# Altium PCB PCB1_v3.PcbDoc
Units mm, origin at the board's own origin, x right, y up, seen from the top; angles counter-clockwise.
Board outline 135.5 x 97.1 mm, 4 copper layers (Top, Signal Layer 1, Signal Layer 2, Bottom), stack 2.04 mm thick; 52 components, 108 nets, 342 pads, 77 vias.
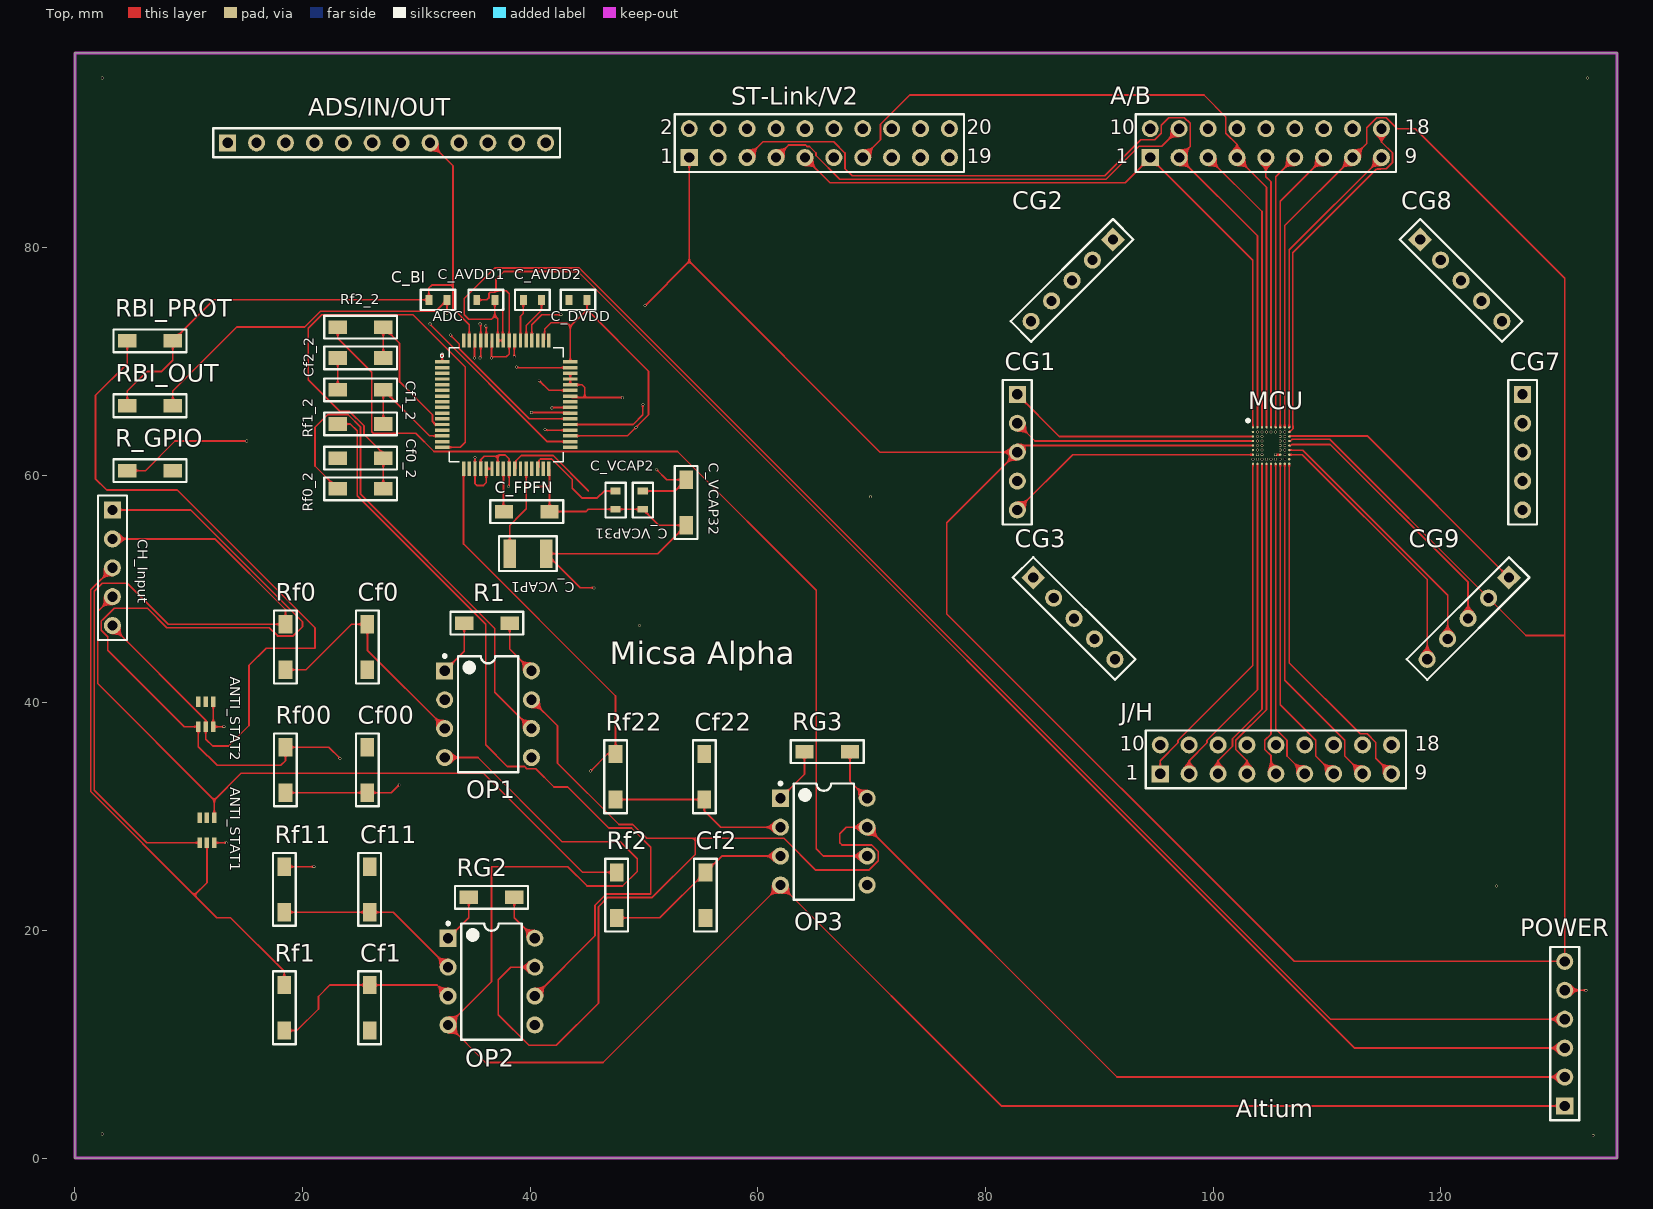
[diagram p0: Top view]
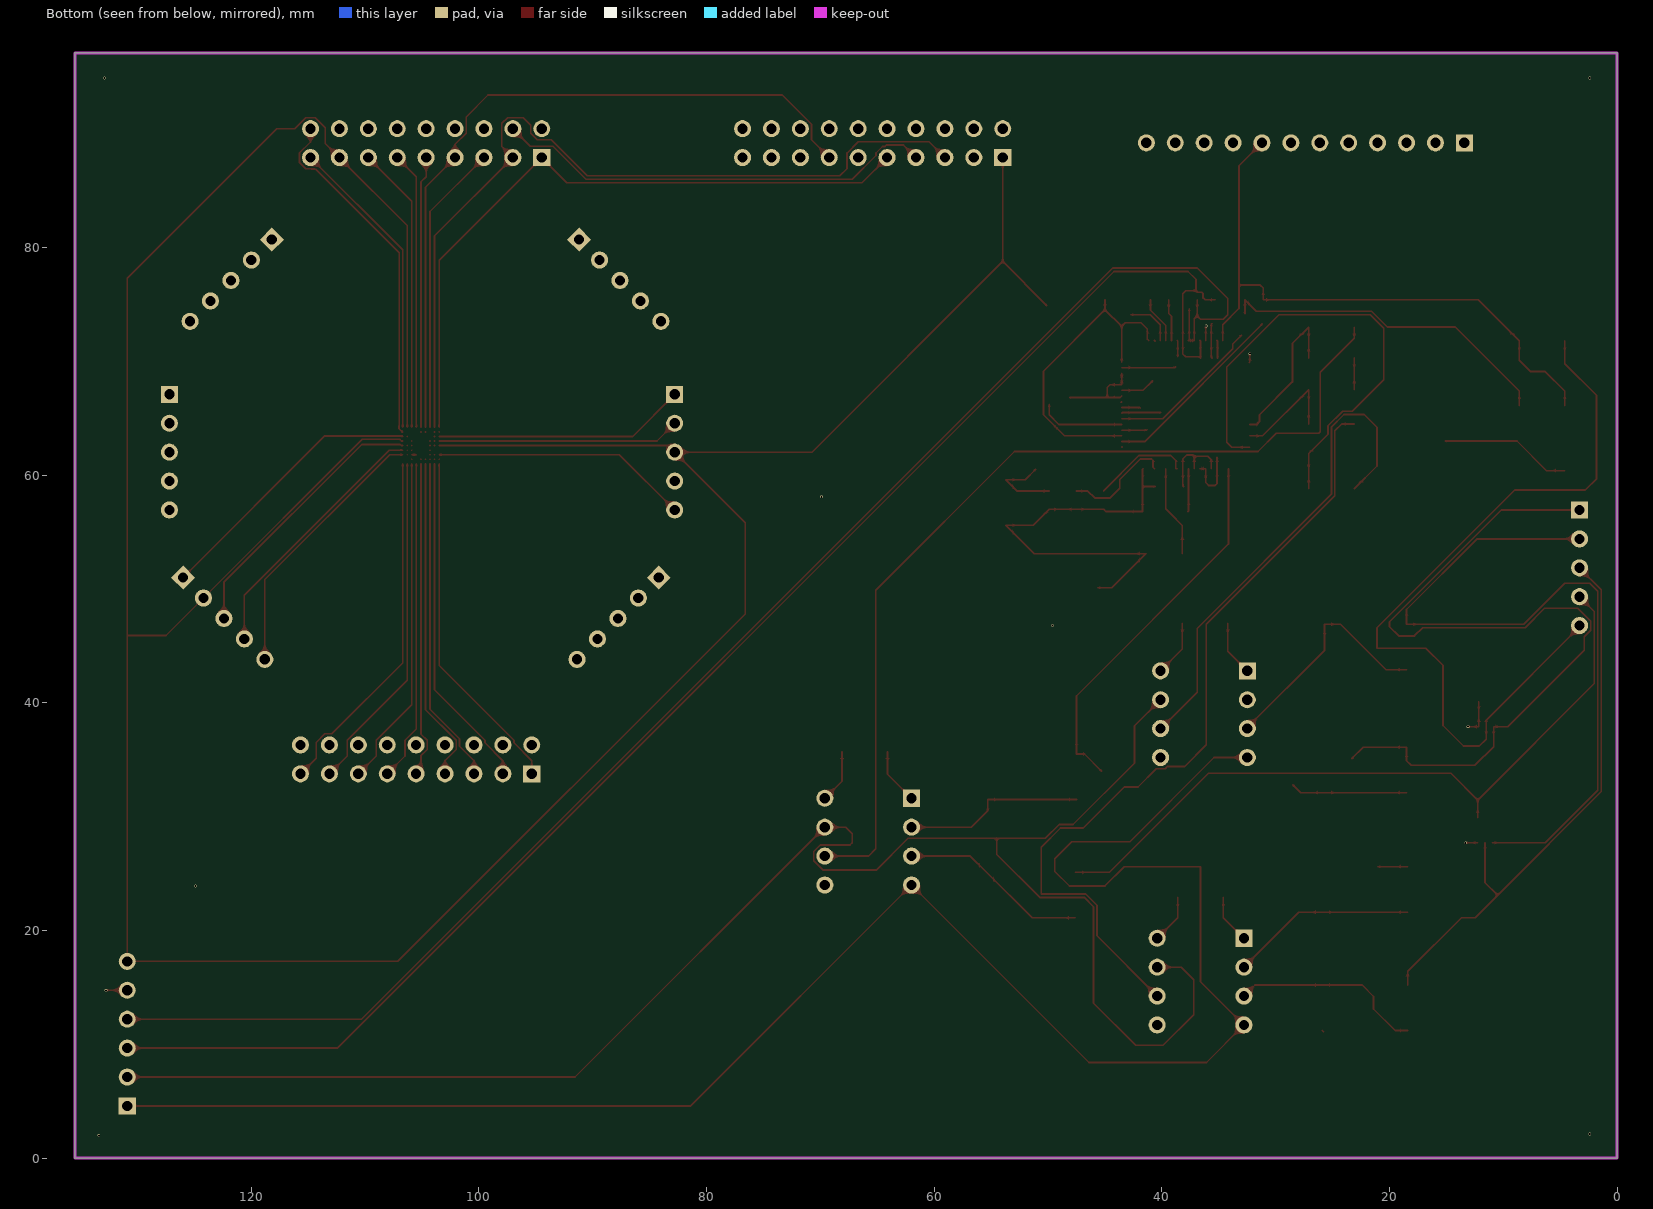
[diagram p1: Bottom view, seen from below]
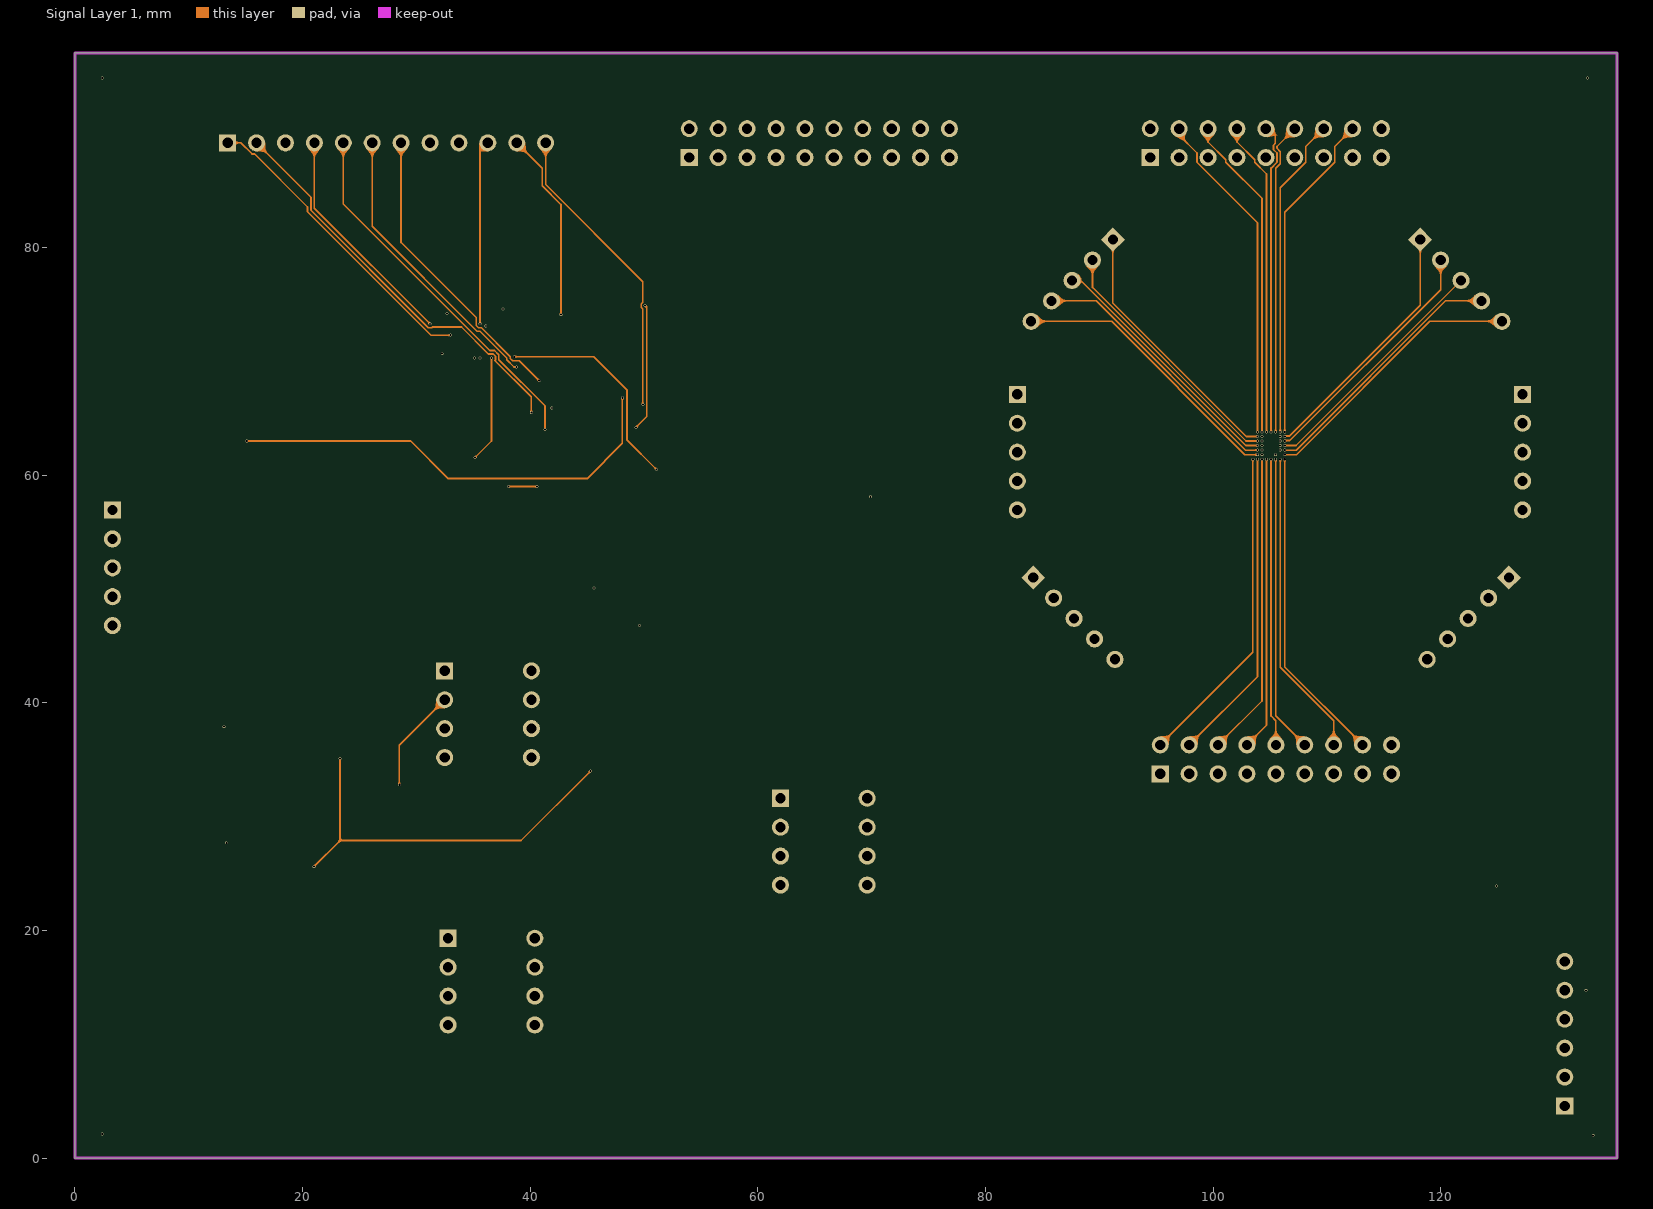
[diagram p2: Signal Layer 1]
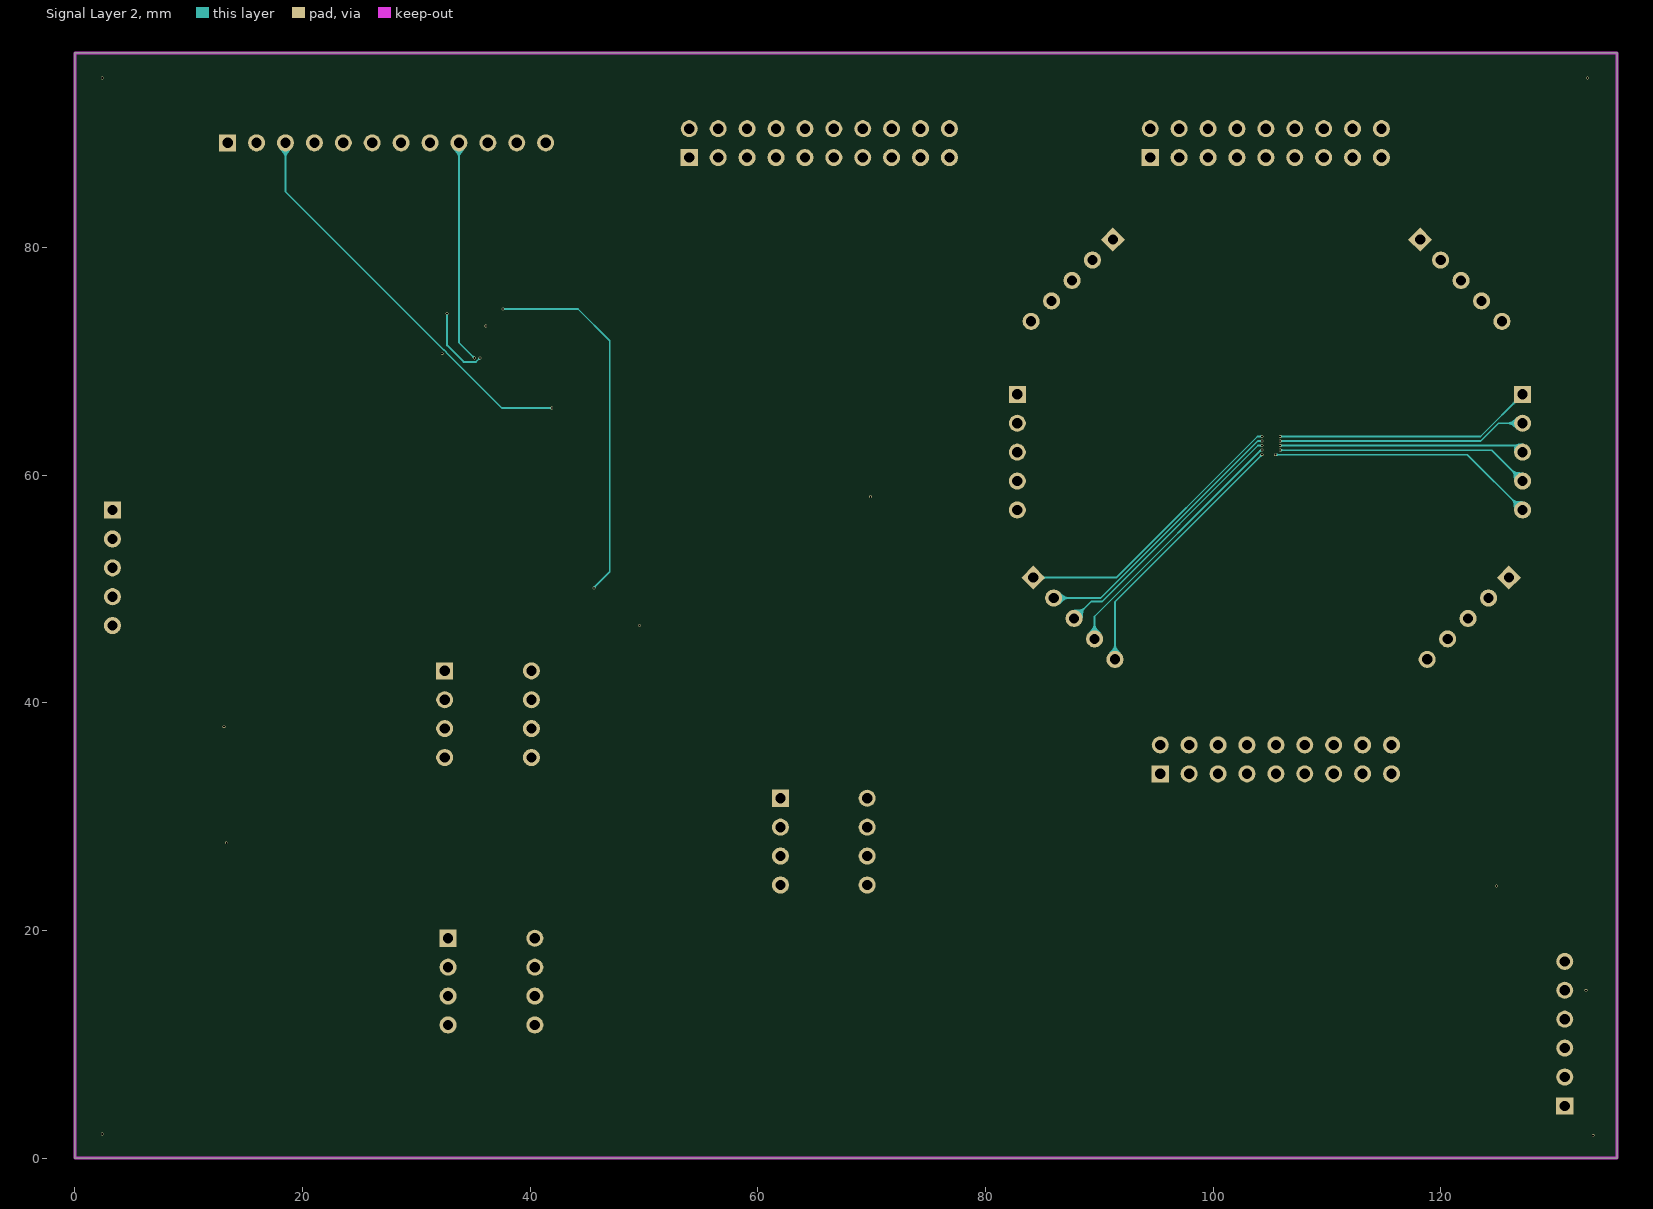
[diagram p3: Signal Layer 2]

## Layer stack, top to bottom
Top Solder: solder mask 0.02, Solder Resist, Dk 3.5
Top: signal copper 0.2
Dielectric 1: core 0.5, FR-4, Dk 4.2
Signal Layer 1: signal copper 0.2
Dielectric 2: prepreg 0.24, FR4, Dk 4.2
Signal Layer 2: signal copper 0.2
Dielectric 3: core 0.5, FR-4, Dk 4.2
Bottom: signal copper 0.2
Bottom Solder: solder mask 0.02, Solder Resist, Dk 3.5

## Board outline
0,0 0,97.1 135.5,97.1 135.5,0

## Design rules (kind name [scope] priority, off if disabled: settings)
Clearance [All] p1: gap=0.15 ignorepadtopadclearanceinfootprint=TRUE
PolygonConnect [All] p1: connectstyle=Relief reliefconductorwidth=0.254 reliefentries=4 polygonreliefangle="90 Angle" airgapwidth=0.254
RoutingTopology [All] p1: topology=Daisy_Balanced
RoutingVias [All] p1: holewidth=0.18 width=0.25 viastyle="Through Hole" minholewidth=0.18 minwidth=0.25 maxholewidth=0.2 maxwidth=0.25
SMDNeckDown [All] p1: percent=90.000
SolderMaskExpansion [All] p1: expansion=0.102
Width [All] p1: maxlimit=0.254 minlimit=0.15 preferedwidth=0.15
29 further rules are at their usual default settings.

## Classes and differential pairs
component class Main: A/B ADS/IN/OUT C_AVDD1 C_AVDD2 C_BI C_DVDD C_FPFN C_VCAP1 C_VCAP2 C_VCAP31 C_VCAP32 CG1 CG2 CG7 CG8 CG9 MCU POWER R_GPIO RBI_OUT RBI_PROT ST-Link/V2
component class AMP_filtreV2: ANTI_STAT1 ANTI_STAT2 Cf00 Cf0 Cf0_2 Cf1 Cf1_2 Cf2_2 Cf11 CH_Input OP1 OP2 R1 Rf0 Rf00 Rf0_2 Rf1 Rf1_2 Rf2 Rf2_2 Rf11 Rf22 RG2

## Components (designator, comment, footprint, x,y, rotation, side; value= is the part's Value field where it differs from the comment)
A/B "Header 9X2A" HDR2X9_CEN 94.48,87.9 r0 top
ADC "ADS1299-4PAG" QFP64P50_1200X1200X120L60X22N 37.9,66.2 r0 top
ADS/IN/OUT "Header 12" HDR1X12 13.42,89.2 r0 top
ANTI_STAT1 "TPD4E1B06DCKR" SC70-6 10.515,28.096 r0 top
ANTI_STAT2 "TPD4E1B06DCKR" SC70-6 10.415,38.296 r0 top
C_AVDD1 "LMK107B7105KA-T" "0603 (1608 Metric)" 36.1,75.4 r0 top value=1uF
C_AVDD2 "LMK107B7105KA-T" "0603 (1608 Metric)" 40.2,75.4 r0 top value=1uF
C_BI "LMK107B7105KA-T" "0603 (1608 Metric)" 31.9,75.4 r180 top value=1uF
C_DVDD "LMK107B7105KA-T" "0603 (1608 Metric)" 44.2,75.4 r180 top value=1uF
C_FPFN "C1206C106J8RACTU" "1206 (3216 Metric)" 39.7,56.8 r0 top value=10uF
C_VCAP1 "JMK325BJ107MM-T" "1210 (3225 Metric)" 39.8,53.1 r180 top value=100uF
C_VCAP2 "LMK107B7105KA-T" "0603 (1608 Metric)" 47.5,57.8 r90 top value=1uF
C_VCAP31 "LMK107B7105KA-T" "0603 (1608 Metric)" 49.9,57.8 r90 top value=1uF
C_VCAP32 "C1206C104F3GACTU" "1206 (3216 Metric)" 53.7,57.6 r90 top value=0.1uF
Cf00 "C1206C106J8RACTU" "1206 (3216 Metric)" 25.7,34.1 r90 top value=10uF
Cf0 "C1206C106J8RACTU" "1206 (3216 Metric)" 25.7,44.9 r90 top value=10uF
Cf0_2 "C1206C106J8RACTU" "1206 (3216 Metric)" 25.1,61.5 r0 top value=10uF
Cf1 "C1206C106J8RACTU" "1206 (3216 Metric)" 25.9,13.2 r90 top value=10uF
Cf1_2 "C1206C106J8RACTU" "1206 (3216 Metric)" 25.1,67.5 r0 top value=10uF
Cf2 "C1206C106J8RACTU" "1206 (3216 Metric)" 55.4,23.1 r90 top value=10uF
Cf2_2 "C1206C106J8RACTU" "1206 (3216 Metric)" 25.1,70.3 r0 top value=10uF
Cf11 "C1206C106J8RACTU" "1206 (3216 Metric)" 25.9,23.6 r90 top value=10uF
Cf22 "C1206C106J8RACTU" "1206 (3216 Metric)" 55.3,33.5 r90 top value=10uF
CG1 "Header 5" HDR1X5 82.8,67.1 r270 top
CG2 "Header 5" HDR1X5 91.2,80.7 r225 top
CG3 "Header 5" HDR1X5 84.2,51 r315 top
CG7 "Header 5" HDR1X5 127.2,67.1 r270 top
CG8 "Header 5" HDR1X5 118.2,80.7 r315 top
CG9 "Header 5" HDR1X5 126,51 r225 top
CH_Input "Header 5" HDR1X5 3.3,56.94 r270 top
J/H "Header 9X2A" HDR2X9_CEN 95.36,33.76 r0 top
MCU "STM32F205RGY6TR" STM-WLCSP64+2 105.1,62.6 r0 top
OP1 "INA118P" TI-P8 36.3,39 r0 top
OP2 "INA118P" TI-P8 36.6,15.5 r0 top
OP3 "INA118P" TI-P8 65.8,27.8 r0 top
POWER "Header 6" HDR1X6 130.9,4.58 r90 top
R1 "Res2" "1206 (3216 Metric) RES" 36.2,47 r180 top value=5K
R_GPIO "RT1206BRD07330KL" "1206 (3216 Metric) RES" 6.6,60.4 r180 top value=330K
RBI_OUT "RG3216P-1004-B-T1" "1206 (3216 Metric) RES" 6.6,66.1 r180 top value=1M
RBI_PROT "RT1206BRD07330KL" "1206 (3216 Metric) RES" 6.6,71.8 r180 top value=330K
Rf00 "RC1206FR-07390RL" "1206 (3216 Metric) RES" 18.5,34.1 r90 top value=390
Rf0 "RC1206FR-07390RL" "1206 (3216 Metric) RES" 18.5,44.9 r90 top value=390
Rf0_2 "RC1206FR-07390RL" "1206 (3216 Metric) RES" 25.1,58.8 r180 top value=390
Rf1 "RC1206FR-07390RL" "1206 (3216 Metric) RES" 18.4,13.2 r90 top value=390
Rf1_2 "RC1206FR-07390RL" "1206 (3216 Metric) RES" 25.1,64.5 r180 top value=390
Rf2 "RC1206FR-07390RL" "1206 (3216 Metric) RES" 47.6,23.1 r90 top value=390
Rf2_2 "RC1206FR-07390RL" "1206 (3216 Metric) RES" 25.1,73 r180 top value=390
Rf11 "RC1206FR-07390RL" "1206 (3216 Metric) RES" 18.4,23.6 r90 top value=390
Rf22 "RC1206FR-07390RL" "1206 (3216 Metric) RES" 47.5,33.5 r90 top value=390
RG2 "Res2" "1206 (3216 Metric) RES" 36.6,22.9 r180 top value=5K
RG3 "RT1206BRD075KL" "1206 (3216 Metric) RES" 66.1,35.7 r180 top value=5K
ST-Link/V2 "XG4C-2031" HDR2X10 53.98,87.9 r0 top

## Footprints (in the part's own frame and the unit in brackets; to place one, negate y for a bottom-side part, rotate by r counter-clockwise, add the part's x,y. Pads: shape width x height; smd on the part's side, far side on the other; paste and mask are expansions set on the pad)
"0603 (1608 Metric)" [mm]
  rect 0.6x0.9 smd: 1(-0.8,0) 2(0.8,0)
  silkscreen extent -1.52,-0.89 1.52,0.89
"1206 (3216 Metric)" [mm]
  rect 1.6x1.2 smd: 1(-2,0) 2(2,0)
  silkscreen extent -3.2,-1 3.2,1
"1206 (3216 Metric) RES" [mm]
  rect 1.6x1.2 smd: 1(-2,0) 2(2,0)
  silkscreen extent -3.2,-1 3.2,1
"1210 (3225 Metric)" [mm]
  rect 1.1x2.5 smd: 1(-1.6,0) 2(1.6,0)
  silkscreen extent -2.54,-1.52 2.54,1.52
HDR1X5 [mm] "Connector; Header; 5 Position"
  rect 1.5x1.5 hole 0.9: 1(0,0)
  round 1.5 hole 0.9: 2(2.54,0) 3(5.08,0) 4(7.62,0) 5(10.16,0)
  silkscreen extent -1.27,-1.27 11.43,1.27
HDR1X6 [mm] "Connector; Header; 6 Position"
  rect 1.5x1.5 hole 0.9: 1(0,0)
  round 1.5 hole 0.9: 2(2.54,0) 3(5.08,0) 4(7.62,0) 5(10.16,0) 6(12.7,0)
  silkscreen extent -1.27,-1.27 13.97,1.27
HDR1X12 [mm] "Connector; Header; 12 Position"
  rect 1.5x1.5 hole 0.9: 1(0,0)
  round 1.5 hole 0.9: 2(2.54,0) 3(5.08,0) 4(7.62,0) 5(10.16,0) 6(12.7,0) 7(15.24,0) 8(17.78,0) 9(20.32,0) 10(22.86,0) 11(25.4,0) 12(27.94,0)
  silkscreen extent -1.27,-1.27 29.21,1.27
HDR2X9_CEN [mm] "Connector; Header; 9x2 Position"
  rect 1.5x1.5 hole 0.9: 1(0,0)
  round 1.5 hole 0.9: 2(2.54,0) 3(5.08,0) 4(7.62,0) 5(10.16,0) 6(12.7,0) 7(15.24,0) 8(17.78,0) 9(20.32,0) 10(0,2.54) 11(2.54,2.54) 12(5.08,2.54) 13(7.62,2.54) 14(10.16,2.54) 15(12.7,2.54) 16(15.24,2.54) 17(17.78,2.54) 18(20.32,2.54)
  silkscreen extent -1.27,-1.27 21.59,3.81
HDR2X10 [mm] "Connector; Header; 10x2 Position"
  rect 1.5x1.5 hole 0.9: 1(0,0)
  round 1.5 hole 0.9: 2(0,2.54) 3(2.54,0) 4(2.54,2.54) 5(5.08,0) 6(5.08,2.54) 7(7.62,0) 8(7.62,2.54) 9(10.16,0) 10(10.16,2.54) 11(12.7,0) 12(12.7,2.54) 13(15.24,0) 14(15.24,2.54) 15(17.78,0) 16(17.78,2.54) 17(20.32,0) 18(20.32,2.54) 19(22.86,0) 20(22.86,2.54)
  silkscreen extent -1.27,-1.27 24.13,3.81
QFP64P50_1200X1200X120L60X22N [mm]
  rect 1.26x0.3 smd: 1(-5.63,3.75) 2(-5.63,3.25) 3(-5.63,2.75) 4(-5.63,2.25) 5(-5.63,1.75) 6(-5.63,1.25) 7(-5.63,0.75) 8(-5.63,0.25) 9(-5.63,-0.25) 10(-5.63,-0.75) 11(-5.63,-1.25) 12(-5.63,-1.75) 13(-5.63,-2.25) 14(-5.63,-2.75) 15(-5.63,-3.25) 16(-5.63,-3.75) 33(5.63,-3.75) 34(5.63,-3.25) 35(5.63,-2.75) 36(5.63,-2.25) 37(5.63,-1.75) 38(5.63,-1.25) 39(5.63,-0.75) 40(5.63,-0.25) 41(5.63,0.25) 42(5.63,0.75) 43(5.63,1.25) 44(5.63,1.75) 45(5.63,2.25) 46(5.63,2.75) 47(5.63,3.25) 48(5.63,3.75)
  rect 0.3x1.26 smd: 17(-3.75,-5.63) 18(-3.25,-5.63) 19(-2.75,-5.63) 20(-2.25,-5.63) 21(-1.75,-5.63) 22(-1.25,-5.63) 23(-0.75,-5.63) 24(-0.25,-5.63) 25(0.25,-5.63) 26(0.75,-5.63) 27(1.25,-5.63) 28(1.75,-5.63) 29(2.25,-5.63) 30(2.75,-5.63) 31(3.25,-5.63) 32(3.75,-5.63) 49(3.75,5.63) 50(3.25,5.63) 51(2.75,5.63) 52(2.25,5.63) 53(1.75,5.63) 54(1.25,5.63) 55(0.75,5.63) 56(0.25,5.63) 57(-0.25,5.63) 58(-0.75,5.63) 59(-1.25,5.63) 60(-1.75,5.63) 61(-2.25,5.63) 62(-2.75,5.63) 63(-3.25,5.63) 64(-3.75,5.63)
  silkscreen extent -5.8,-5 5,5
SC70-6 [mm]
  rect 0.4x0.9 smd: 1(0.435,-0.396) 2(1.085,-0.396) 3(1.735,-0.396) 4(1.735,1.803) 5(1.085,1.804) 6(0.435,1.803)
STM-WLCSP64+2 [mm] "BGA, 66-Balls, Body 3.97x3.64mm, Pitch 0.4mm"
  round 0.2 smd: A1(-1.6,1.6) A2(-1.2,1.6) A3(-0.8,1.6) A4(-0.4,1.6) A5(0,1.6) A6(0.4,1.6) A7(0.8,1.6) A8(1.2,1.6) A9(1.6,1.6) B1(-1.6,1.2) B2(-1.2,1.2) B3(-0.8,1.2) B4(-0.4,1.2) B5(0,1.2) B6(0.4,1.2) B7(0.8,1.2) B8(1.2,1.2) B9(1.6,1.2) C1(-1.6,0.8) C2(-1.2,0.8) C3(-0.8,0.8) C7(0.8,0.8) C8(1.2,0.8) C9(1.6,0.8) D1(-1.6,0.4) D2(-1.2,0.4) D3(-0.8,0.4) D7(0.8,0.4) D8(1.2,0.4) D9(1.6,0.4) E1(-1.6,0) E2(-1.2,0) E3(-0.8,0) E7(0.8,0) E8(1.2,0) E9(1.6,0) F1(-1.6,-0.4) F2(-1.2,-0.4) F3(-0.8,-0.4) F7(0.8,-0.4) F8(1.2,-0.4) F9(1.6,-0.4) G1(-1.6,-0.8) G2(-1.2,-0.8) G3(-0.8,-0.8) G7(0.8,-0.8) G8(1.2,-0.8) G9(1.6,-0.8) H1(-1.6,-1.2) H2(-1.2,-1.2) H3(-0.8,-1.2) H4(-0.4,-1.2) H5(0,-1.2) H6(0.4,-1.2) H7(0.8,-1.2) H8(1.2,-1.2) H9(1.6,-1.2) J1(-1.6,-1.6) J2(-1.2,-1.6) J3(-0.8,-1.6) J4(-0.4,-1.6) J5(0,-1.6) J6(0.4,-1.6) J7(0.8,-1.6) J8(1.2,-1.6) J9(1.6,-1.6)
  silkscreen extent -2.15,2.07 -1.9,2.32, body extent -1.82,-1.98 1.82,1.98, height 0.6
TI-P8 [mm] "DIP, 8-Leads, Body 10.15x6.6mm, Pitch 2.54mm"
  rect 1.5x1.5 hole 0.9: 1(-3.81,3.81)
  round 1.5 hole 0.9: 2(-3.81,1.27) 3(-3.81,-1.27) 4(-3.81,-3.81) 5(3.81,-3.81) 6(3.81,-1.27) 7(3.81,1.27) 8(3.81,3.81)
  silkscreen extent -3.93,-5.1 2.65,5.23, body extent -3.95,-5.07 3.95,5.07, height 5.08

## Part data
A/B J/H: "Header, 9-Pin, Dual row", LatestRevisionDate=17-Jul-2002, LatestRevisionNote="Re-released for DXP Platform.", Publisher="Altium Limited"
ADC: "IC AFE 4-CH 24BIT 64TQFP", Package="TQFP-64 Texas Instruments", Availability=Good, MF="Texas Instruments", MP=ADS1299-4PAG, Price="27.58 USD"
ADS/IN/OUT: "Header, 12-Pin", LatestRevisionDate=17-Jul-2002, LatestRevisionNote="Re-released for DXP Platform.", Publisher="Altium Limited"
ANTI_STAT1 ANTI_STAT2: "TVS DIODE 5.5VWM 14.5VC SC70-6", Package="SC-70 Texas Instruments", Availability=Good, MF="Texas Instruments", MP=TPD4E1B06DCKR, Price="0.29 USD"
C_AVDD1 C_AVDD2 C_BI C_DVDD C_VCAP2 C_VCAP31: library part Cap, "1µF ±10% 10V Ceramic Capacitor X7R 0603 (1608 Metric)", LatestRevisionDate=17-Jul-2002, LatestRevisionNote="Re-released for DXP Platform.", Published=8-Jun-2000, Publisher="Altium Limited"
  C_AVDD1 C_AVDD2 C_DVDD C_VCAP2 C_VCAP31: PackageDescription="Surface Mount, MLCC", PackageReference="0603 (1608 Metric)"
  C_BI: PackageDescription="0603 (1608 Metric)"
C_FPFN Cf00 Cf0 Cf0_2 Cf1 Cf1_2 Cf2 Cf2_2 Cf11 Cf22: library part Cap, "10µF ±5% 10V Ceramic Capacitor X7R 1206 (3216 Metric)", LatestRevisionDate=17-Jul-2002, LatestRevisionNote="Re-released for DXP Platform.", PackageDescription="CAP CER 10UF 10V X7R 1206", PackageReference="1206 (3216 Metric)", Published=8-Jun-2000, Publisher="Altium Limited"
C_VCAP1: library part Cap, "100µF ±20% 6.3V Ceramic Capacitor X5R 1210 (3225 Metric)", LatestRevisionDate=17-Jul-2002, LatestRevisionNote="Re-released for DXP Platform.", PackageDescription="1210 (3225 Metric)", PackageReference=MK325, Published=8-Jun-2000, Publisher="Altium Limited"
C_VCAP32: library part Cap, "0.1µF ±1% 25V Ceramic Capacitor C0G, NP0 1206 (3216 Metric)", LatestRevisionDate=17-Jul-2002, LatestRevisionNote="Re-released for DXP Platform.", PackageDescription="CAP CER 0.1UF 25V C0G/NP0 1206", PackageReference="1206 (3216 Metric)", Published=8-Jun-2000, Publisher="Altium Limited"
CG1 CG2 CG3 CG7 CG8 CG9 CH_Input: "Header, 5-Pin", LatestRevisionDate=17-Jul-2002, LatestRevisionNote="Re-released for DXP Platform.", Publisher="Altium Limited"
MCU: "ARM Cortex-M3 32-bit MCU, 1024 KB Flash, 128 KB Internal RAM, 51 I/Os, 66-pin WLCSP, -40 to 85 degC, Tape and Reel", I/Os (High Current)=51, Operating Frequency(F) (Processor speed) (MHz)=120, Supplier Part Number 1=497-13338-2-ND, Supply Voltage(Vcc) min (V)=1.8, ComponentLink1Description="Manufacturer URL", ComponentLink1URL=http://www.st.com/web/en/home.html, ComponentLink2Description=Datasheet, ComponentLink2URL=http://www.st.com/st-web-ui/static/active/en/resource/technical/document/datasheet/CD00237391.pdf, ComponentLink3Description="Package Specification", ComponentLink3URL=http://www.st.com/st-web-ui/static/active/en/resource/technical/document/datasheet/CD00237391.pdf, Core="ARM Cortex-M3", D/A Converter="2x12-bit (2 Channel)", DatasheetVersion="Rev. 9", FLASH Size (Prog) (kB)=1024, Internal RAM Size (kB)=128, Mounting Technology="Surface Mount", PackageDescription="64+2-Ball Wafer Level Chip Size package, 3.639 x 3.971 mm Body, 0.4 mm Pitch", PackageReference=WLCSP64+2, PackageVersion="Rev. 10, 10/2012", Packing="Tape and Reel", PartNumber=STM32F205RGY6TR, Supplier 1=Digi-Key, Supplier 2=Digi-Key, Supplier 3=Digi-Key, Supplier 4=Newark, Supplier 5=Newark, Supplier Part Number 2=497-13338-1-ND, Supplier Part Number 3=497-13338-6-ND, Supplier Part Number 4=99W9826, Supplier Part Number 5=73T2317
OP1 OP2 OP3: "Precision, Low Power Instrumentation Amplifier, -40 to 85 degC, 8-pin DIP (P8), Green (RoHS & no Sb/Br)", Input Bias Current (+/-)(Max)(nA)=10, Manufacturer="Texas Instruments", Quiescent Current (+/-)(Typ)(mA)=0.35, Supplier Part Number 1=INA118P-ND, CMRR(Min)(dB)=98, Code_JEDEC=MS-001, ComponentLink1Description="Manufacturer URL", ComponentLink1URL=http://www.ti.com/, ComponentLink2Description=Datasheet, ComponentLink2URL=http://www.ti.com/general/docs/lit/getliterature.tsp?genericPartNumber=INA118&fileType=pdf, ComponentLink3Description="Package Specification", ComponentLink3URL=http://www.ti.com/litv/pdf/mpdi001b, DatasheetVersion=SBOS027, Eco-Plan="Green (RoHS & no Sb/Br)", Gain(V/V)="1 to 10000", Input Offset (+/-)(Max)(uV)=125, Input Offset Drift (+/-)(Max)(uV/Degrees Celsius)=1, Mounting Technology="Through Hole", Noise at 1kHz(Typ)(nV/rt(Hz))=10, Non-Linearity (+/-)(Max)(%)=0.004, Number of Channels=1, Output Offset (+/-)(Max)(uV)=1000/G, Output Offset Drift (+/-)(Max)(uV/Degrees Celsius)=20/G, PackageDescription="8-Pin Plastic In-Line, Body 9.59 x 6.35 mm, Pitch 2.54 mm", PackageReference=P8, PackageVersion="4040082/E, 04/2010", PartNumber=INA118P, SubFamily="Single Supply", Supplier 1=Digi-Key, Supplier 2=Newark, Supplier 3=Mouser, Supplier Part Number 2=96K4515, Supplier Part Number 3=595-INA118P, Vs(Max)(V)=36, Vs(Min)(V)=2.7
POWER: "Header, 6-Pin", LatestRevisionDate=17-Jul-2002, LatestRevisionNote="Re-released for DXP Platform.", Publisher="Altium Limited"
R1 RG2: "5 kOhms ±0.1% 0.25W, 1/4W Chip Resistor 1206 (3216 Metric) Moisture Resistant Thin Film", LatestRevisionDate=17-Jul-2002, LatestRevisionNote="Re-released for DXP Platform.", PackageDescription="RES SMD 5K OHM 0.1% 1/4W 1206", PackageReference="1206 (3216 Metric)", Published=8-Jun-2000, Publisher="Altium Limited"
R_GPIO RBI_PROT: library part Res2, "330 kOhms ±0.1% 0.25W, 1/4W Chip Resistor 1206 (3216 Metric) Moisture Resistant Thin Film", LatestRevisionDate=17-Jul-2002, LatestRevisionNote="Re-released for DXP Platform.", PackageDescription="RES SMD 330K OHM 0.1% 1/4W 1206", PackageReference="1206 (3216 Metric)", Published=8-Jun-2000, Publisher="Altium Limited"
RBI_OUT: library part Res2, "1 MOhms ±0.1% 0.25W, 1/4W Chip Resistor 1206 (3216 Metric) Anti-Sulfur, Automotive AEC-Q200 Thin Film", LatestRevisionDate=17-Jul-2002, LatestRevisionNote="Re-released for DXP Platform.", PackageDescription="RES SMD 1M OHM 0.1% 1/4W 1206", PackageReference="1206 (3216 Metric)", Published=8-Jun-2000, Publisher="Altium Limited"
Rf00 Rf0 Rf11 Rf22: library part Res2, "390 Ohms ±1% 0.25W, 1/4W Chip Resistor 1206 (3216 Metric) Moisture Resistant Thick Film", LatestRevisionDate=17-Jul-2002, LatestRevisionNote="Re-released for DXP Platform.", PackageDescription="RES SMD 390 OHM 1% 1/4W 1206", PackageReference="1206 (3216 Metric)", Published=8-Jun-2000, Publisher="Altium Limited"
Rf0_2 Rf1 Rf1_2 Rf2 Rf2_2: library part Res2, "Resistor", LatestRevisionDate=17-Jul-2002, LatestRevisionNote="Re-released for DXP Platform.", PackageDescription="RES SMD 390 OHM 1% 1/4W 1206", PackageReference="1206 (3216 Metric)", Published=8-Jun-2000, Publisher="Altium Limited"
RG3: library part Res2, "5 kOhms ±0.1% 0.25W, 1/4W Chip Resistor 1206 (3216 Metric) Moisture Resistant Thin Film", LatestRevisionDate=17-Jul-2002, LatestRevisionNote="Re-released for DXP Platform.", PackageDescription="RES SMD 5K OHM 0.1% 1/4W 1206", PackageReference="1206 (3216 Metric)", Published=8-Jun-2000, Publisher="Altium Limited"
ST-Link/V2: library part "Header 10X2", "Header, 10-Pin, Dual row", LatestRevisionDate=17-Jul-2002, LatestRevisionNote="Re-released for DXP Platform.", Publisher="Altium Limited"

## Free pads (board coordinates)
  round 0 on Mech16 paste+0 mask+0: 1(57.8,52)

## Via types
v1: diameter 0.25, hole 0.18, Top to Signal Layer 1, 49 vias
v2: diameter 0.25, hole 0.18, Top to Signal Layer 2, 16 vias
v3: diameter 0.25, hole 0.18, Top to Bottom, 12 vias

## Nets (pads, with @x,y where several pads share a name; then routed paths per layer and width w, separated by ;. In a path a pad name is that pad's centre, name@x,y a point inside that pad or via, vN(x,y) a via of type N, cw(c..) or ccw(c..) an arc to the next point about the centre after c; other vN are vias at no path point)
AVDD: ADC.19 ADC.21 ADC.22 ADC.56 ADC.59 C_AVDD1.1 POWER.3 | length 150
  Top w0.15: v1(35.15,61.55) ADC.19 35.15,59.25 35.3,59.1 35.9,59.1 36.15,59.35 ADC.21 ADC.22 ; C_AVDD1.1 36.2,75.4 36.375,75.575 36.375,75.943 36.507,76.075 36.875,76.075 37,76.2 ; ADC.59 36.6,71.78 v1(36.6,70.3) 36.7,70.4 37.9,70.4 38.15,70.65 ADC.56 38.15,75.95 37.9,76.2 37,76.2 ; POWER.3 112.44,9.66 44.2,77.9 37.7,77.9 37,77.2 37,76.2
  Signal Layer 1 w0.15: v1(35.15,61.55) 36.6,63 v1(36.6,70.3)
AVSS: ADC.20 ADC.23 ADC.25 ADC.32 ADC.57 ADC.58 C_AVDD1.2 C_FPFN.2 C_VCAP1.1 C_VCAP2.1 C_VCAP31.1 C_VCAP32.1 POWER.4 | length 215.3
  Top w0.15: ADC.20 35.65,61.35 35.95,61.65 37.15,61.65 ; C_AVDD1.2 36.9,74 ; ADC.23 37.15,61.65 ; v2(37.6,74.6) 37.6,71.88 ADC.57 ADC.58 37.15,73.75 36.9,74 ; v1(38.1,59) 38.15,59.05 ADC.25 38.15,61.425 37.8,61.775 37.275,61.775 37.15,61.65 ; v1(40.6,59) 41.7,59 ; ADC.32 41.7,60.52 41.7,59 ; v2(45.6,50.1) 44.4,50.1 C_VCAP1.1 51.2,53.1 C_VCAP32.1 51.3,55.6 C_VCAP31.1 C_VCAP2.1 45.1,57 44.9,56.8 C_FPFN.2 41.7,59 ; POWER.4 110.324,12.2 44.324,78.2 36.876,78.2 34.2,75.524 34.2,74.1 34.6,73.7 36.6,73.7 36.9,74
  Signal Layer 1 w0.15: v1(38.1,59) v1(40.6,59)
  Signal Layer 2 w0.15: v2(37.6,74.6) 44.2,74.6 47,71.8 47,51.5 v2(45.6,50.1)
DVDD: A/B.8 ADC.35 ADC.48 ADC.50 C_DVDD.1 CG1.3 CG9.2 MCU.A8 MCU.D9 MCU.E1 POWER.6 ST-Link/V2.1 | length 339.4
  Top w0.15: ADC.50 41.275,71.955 41.275,72.841 41.834,73.4 43.2,73.4 43.53,73.07 ; ADC.35 48.55,63.45 v1(49.3,64.2) 50.4,65.3 50.4,69.14 45,74.54 ; ADC.48 43.53,73.07 ; C_DVDD.1 45,74.54 ; v1(50.1,74.9) 53.98,78.78 ; ST-Link/V2.1 53.98,78.78 ; MCU.E1 83.38,62.6 CG1.3 ; MCU.A8 106.3,81.94 A/B.8 113.5,89.14 113.5,90.519 114.396,91.415 115.204,91.415 116.179,90.44 117.76,90.44 130.9,77.3 130.9,45.908 ; MCU.D9 106.805,63 106.955,63.15 110.258,63.15 CG9.2 127.5,45.908 130.9,45.908 ; 43.53,73.07 45,74.54 ; 53.98,78.78 70.74,62.02 CG1.3 ; CG1.3 76.6,55.82 76.6,47.8 107.12,17.28 POWER.6 130.9,40 130.9,45.908
  Signal Layer 1 w0.15: v1(49.3,64.2) 50.25,65.15 50.25,74.75 v1(50.1,74.9)
GNDA: A/B.10 ADC.1 ADC.2 ADC.3 ADC.4 ADC.5 ADC.6 ADC.7 ADC.8 ADC.9 ADC.10 ADC.31 ADC.33 ADC.41 ADC.49 ADC.51 ADC.60 ANTI_STAT1.3 ANTI_STAT1.5 ANTI_STAT2.3 ANTI_STAT2.4 ANTI_STAT2.5 C_DVDD.2 Cf0.1 Cf00.2 Cf0_2.1 Cf1.1 Cf1_2.1 Cf2.1 Cf2_2.1 Cf11.2 Cf22.2 CG1.4 CG8.2 J/H.18 MCU.B1 MCU.D8 MCU.F1 MCU.H9 OP1.5 OP2.5 OP3.5 POWER.5 R_GPIO.1 ST-Link/V2.4 ST-Link/V2.6 ST-Link/V2.8 ST-Link/V2.10 ST-Link/V2.12 ST-Link/V2.14 ST-Link/V2.16 ST-Link/V2.18 ST-Link/V2.20 | length 33.1
  Top w0.15: ANTI_STAT2.4 ANTI_STAT2.3 v3(13.1,37.9) ; ANTI_STAT1.3 v3(13.3,27.7) ; Cf1_2.1 Cf2_2.1 ; Cf1.1@25.8,11.1 Cf1.1 ; v3(32.27,70.67) ADC.1 ADC.1@32.32,69.9 ; v3(36.1,73.1) 36.15,73.05 ADC.60 ; ADC.51@40.6,71.78 ADC.51 ; ADC.33@43.48,62.5 ADC.33 ; ADC.41 ADC.41@43.58,66.4 ; POWER.5 v3(132.76,14.74)
  Signal Layer 1 w0.15: v1(106.3,63) 106.35,63.05 106.75,63.05 119.996,76.296 CG8.2
  other v3: 133.4,2 2.4,2.1 124.9,23.9 49.6,46.8 69.9,58.1 2.4,94.9 132.9,94.9
NetA/B_1: A/B.1 MCU.A1 ST-Link/V2.9 | length 59.6
  Top w0.15: ST-Link/V2.9 66.34,85.7 92.28,85.7 A/B.1 103.5,78.88 MCU.A1
NetA/B_2: A/B.2 MCU.A2 ST-Link/V2.5 | length 74.3
  Top w0.15: ST-Link/V2.5 60.46,89.3 66.659,89.3 67.655,88.304 67.655,86.945 68.3,86.3 90.476,86.3 93.641,89.465 94.884,89.465 95.455,90.036 95.455,90.755 96.115,91.415 97.485,91.415 97.995,90.905 97.995,88.875 A/B.2 103.9,81.02 MCU.A2
NetA/B_3: A/B.3 MCU.A3 | length 25.7
  Top w0.15: A/B.3 104.3,83.16 MCU.A3
NetA/B_4: A/B.4 MCU.A4 ST-Link/V2.13 | length 64.5
  Top w0.15: ST-Link/V2.13 70.785,89.465 70.785,90.844 73.341,93.4 99.2,93.4 101.125,91.475 101.125,90.036 102.1,89.061 A/B.4 104.7,85.3 MCU.A4
NetA/B_5: A/B.5 MCU.A5 | length 23.9
  Top w0.15: A/B.5 104.64,86.22 105.1,85.76 MCU.A5
NetA/B_6: A/B.6 MCU.A6 | length 24.4
  Top w0.15: MCU.A6 105.5,86.22 A/B.6
NetA/B_7: A/B.7 MCU.A7 | length 25.3
  Top w0.15: MCU.A7 105.9,84.08 A/B.7
NetA/B_9: A/B.9 MCU.A9 | length 27.1
  Top w0.15: MCU.A9 106.7,79.8 A/B.9
NetA/B_11: A/B.11 MCU.B2 ST-Link/V2.7 | length 68.6
  Top w0.15: ST-Link/V2.7 62.7,89 64.201,89 64.326,88.875 64.544,88.875 65.115,88.304 65.115,88.086 67.201,86 90.6,86 93.5,88.9 95.48,88.9 A/B.11
  Signal Layer 1 w0.15: A/B.11 97.02,89.869 98.585,88.304 98.585,87.496 103.9,82.181 v1(103.9,63.8)
NetA/B_12: A/B.12 MCU.B3 | length 28.6
  Signal Layer 1 w0.15: A/B.12 99.56,89.279 101.125,87.714 101.125,87.496 104.3,84.321 v1(104.3,63.8)
NetA/B_13: A/B.13 MCU.B4 | length 27.7
  Signal Layer 1 w0.15: A/B.13 102.1,89.279 103.665,87.714 103.665,87.496 104.7,86.461 v1(104.7,63.8)
NetA/B_14: A/B.14 MCU.B5 | length 27.6
  Signal Layer 1 w0.15: A/B.14 105.1,89.98 105.465,89.98 105.465,89.149 105.315,88.999 105.315,88.604 105.615,88.304 105.615,87.496 105.1,86.981 v1(105.1,63.8)
NetA/B_15: A/B.15 MCU.B6 | length 27.6
  Signal Layer 1 w0.15: v1(105.5,63.8) 105.5,86.957 105.915,87.372 105.915,88.428 105.615,88.728 105.615,88.875 A/B.15
NetA/B_16: A/B.16 MCU.B7 | length 28.2
  Signal Layer 1 w0.15: v1(105.9,63.8) 105.9,85.241 108.155,87.496 108.155,88.875 A/B.16
NetA/B_17: A/B.17 MCU.B8 | length 29.1
  Signal Layer 1 w0.15: v1(106.3,63.8) 106.3,83.101 110.695,87.496 110.695,88.875 A/B.17
NetA/B_18: A/B.18 MCU.B9 | length 31.4
  Top w0.15: MCU.B9 106.76,63.8 106.76,63.875 106.835,63.875 107.025,64.065 107.025,64.335 107.001,64.359 107.001,64.508 107,64.509 107,79.529 114.346,86.874 114.358,86.874 114.374,86.891 114.444,86.891 114.458,86.904 114.744,86.904 114.764,86.925 114.885,86.925 115.204,86.925 115.775,87.496 115.775,88.304 114.8,89.279 A/B.18
NetADC_12: ADC.12 Cf2_2.2 Rf2_2.1 | length 13.7
  Top w0.15: Cf2_2.2 Rf2_2.1 28.527,71.573 28.527,68.193 31.415,65.305 31.415,65.207 ; 31.415,65.193 31.415,64.707 31.672,64.45 ADC.12
NetADC_14: ADC.14 Cf1_2.2 Rf1_2.1 | length 9.8
  Top w0.15: Rf1_2.1 Cf1_2.2 31.15,63.45 ADC.14
NetADC_16: ADC.16 Cf0_2.2 Rf0_2.1 | length 42.4
  Top w0.15: Rf0_2.1 Cf0_2.2 27.1,61.9 25.4,63.6 25.4,64.342 24.117,65.625 23.257,65.625 20.5,68.382 20.5,72.9 21.7,74.1 29.7,74.1 34.3,69.5 34.3,62.9 33.85,62.45 ADC.16
NetADC_17: ADC.17 ANTI_STAT2.1 CH_Input.1 Rf00.2 Rf11.2 Rf22.2 | length 141.9
  Top w0.15: CH_Input.1 10.178,56.94 20,47.118 20,46.682 19.193,45.875 17.807,45.875 17.082,46.6 8.076,46.6 6.376,48.3 3.441,48.3 2.496,47.354 2.325,47.184 2.325,46.376 2.896,45.805 2.896,44.604 9.6,37.9 ANTI_STAT2.1 10.849,36.151 12.5,34.5 18.1,34.5 18.5,34.9 Rf00.2 22.3,36.1 v1(23.3,35.1) ; Rf11.2 v1(21,25.6) ; ADC.17 34.15,53.95 47.5,40.6 Rf22.2 46.8,35.5 v1(45.3,34)
  Signal Layer 1 w0.15: v1(21,25.6) 23.3,27.9 ; v1(23.3,35.1) 23.3,27.9 ; v1(45.3,34) 39.2,27.9 23.3,27.9
NetADC_24: ADC.24 C_FPFN.1 | length 3.8
  Top w0.15: ADC.24 37.65,56.85 C_FPFN.1
NetADC_26: ADC.26 | length 8.7
  Top w0.15: ADC.26 38.775,60.57 38.775,61.293 39.207,61.725 42.017,61.725 45.1,58.642 45.1,58.6
NetADC_28: ADC.28 C_VCAP1.2 | length 8.1
  Top w0.15: C_VCAP1.2 38.2,55.582 38.725,56.107 38.725,56.125 39.65,57.05 ADC.28
NetADC_30: ADC.30 C_VCAP2.2 | length 9.7
  Top w0.15: ADC.30 40.775,60.695 40.775,61.293 40.907,61.425 41.893,61.425 43.7,59.618 43.7,58.845 44.545,58 45.9,58 46.5,58.6 C_VCAP2.2
NetADC_34: ADC.34 ADS/IN/OUT.4 | length 36.8
  Top w0.15: v1(31.2,73.3) 31.2,73.258 41.508,62.95 ADC.34
  Signal Layer 1 w0.15: ADS/IN/OUT.4 21.04,83.46 v1(31.2,73.3)
NetADC_36: ADC.36 ADS/IN/OUT.5 | length 35
  Top w0.15: v1(41.3,64) 41.35,63.95 ADC.36
  Signal Layer 1 w0.15: ADS/IN/OUT.5 23.58,83.82 36.45,70.95 36.869,70.95 37.25,70.569 37.25,70.15 41.3,66.1 v1(41.3,64)
NetADC_37: ADC.37 ADS/IN/OUT.12 | length 34.3
  Top w0.15: ADC.37 49.05,64.45 49.9,65.3 v1(49.9,66.2)
  Signal Layer 1 w0.15: ADS/IN/OUT.12 41.36,85.54 49.9,77 49.9,75.195 49.75,75.045 49.75,74.755 49.9,74.605 v1(49.9,66.2)
NetADC_38: ADC.38 ADS/IN/OUT.1 | length 40.6
  Top w0.15: v1(33,72.3) 33.775,71.525 33.775,71.107 39.932,64.95 ADC.38
  Signal Layer 1 w0.15: ADS/IN/OUT.1 14.581,89.2 15.556,88.225 15.775,88.225 20.44,83.56 20.44,83.141 31.281,72.3 v1(33,72.3)
NetADC_39: ADC.39 ADS/IN/OUT.2 | length 39.2
  Top w0.15: v1(40.1,65.5) 43.48,65.5 ADC.39
  Signal Layer 1 w0.15: ADS/IN/OUT.2 20.74,84.42 20.74,83.265 31.055,72.95 31.345,72.95 31.41,73.015 33.961,73.015 36.326,70.65 36.745,70.65 36.95,70.445 36.95,70.126 36.9,70.076 40.1,66.876 v1(40.1,65.5)
NetADC_40: ADC.40 ADS/IN/OUT.3 | length 37.2
  Top w0.15: v2(41.9,65.9) 41.95,65.95 ADC.40
  Signal Layer 2 w0.15: ADS/IN/OUT.3 18.5,84.9 32.38,71.02 32.415,71.02 32.62,70.815 32.62,70.78 37.5,65.9 v2(41.9,65.9)
NetADC_42: ADC.42 ADC.44 ADC.45 ADC.46 R_GPIO.2 | length 59.1
  Top w0.15: R_GPIO.2 6.2,60.4 8.8,63 v1(15.1,63) ; ADC.42 43.655,66.825 44.8,66.825 ; ADC.46 ADC.45 ADC.44 44.55,67.95 44.8,67.7 44.8,66.825 ; v1(48.1,66.8) 48.075,66.825 44.8,66.825
  Signal Layer 1 w0.15: v1(15.1,63) 29.5,63 32.8,59.7 45,59.7 48.1,62.8 v1(48.1,66.8)
NetADC_43: ADC.43 ADS/IN/OUT.7 | length 29.5
  Top w0.15: v1(40.8,68.3) 41.65,67.45 ADC.43
  Signal Layer 1 w0.15: ADS/IN/OUT.7 28.66,80.44 35.25,73.85 35.25,73.155 35.455,72.95 35.718,72.95 38.25,70.418 38.25,70.255 38.455,70.05 39.05,70.05 v1(40.8,68.3)
NetADC_47: ADC.47 ADS/IN/OUT.6 | length 30
  Top w0.15: v1(38.8,69.5) 38.85,69.45 ADC.47
  Signal Layer 1 w0.15: ADS/IN/OUT.6 26.12,81.861 35.331,72.65 35.593,72.65 37.95,70.293 37.95,70.131 38.581,69.5 v1(38.8,69.5)
NetADC_52: ADC.52 ADS/IN/OUT.11 | length 21
  Top w0.15: ADC.52 40.15,73.226 41.024,74.1 v1(42.7,74.1)
  Signal Layer 1 w0.15: ADS/IN/OUT.11 41.06,86.96 41.06,85.416 42.7,83.776 v1(42.7,74.1)
NetADC_53: ADC.53 C_AVDD2.2 | length 4.1
  Top w0.15: ADC.53 39.65,73.15 41,74.5 C_AVDD2.2
NetADC_54: ADC.54 C_AVDD2.1 | length 3.7
  Top w0.15: ADC.54 39.15,73.95 39.4,74.2 C_AVDD2.1
NetADC_55: ADC.55 C_VCAP31.2 C_VCAP32.2 | length 27.8
  Top w0.15: v1(38.6,70.4) 38.6,71.78 ADC.55 ; C_VCAP31.2 52.7,58.6 C_VCAP32.2 52,59.6 v1(51.1,60.5)
  Signal Layer 1 w0.15: v1(38.6,70.4) 45.6,70.4 48.5,67.5 48.5,63.1 v1(51.1,60.5)
NetADC_61: ADC.61 ADS/IN/OUT.10 C_BI.1 RBI_OUT.1 | length 55.6
  Top w0.15: RBI_OUT.1 8.6,67.4 14.224,73.024 20.2,73.024 21.576,74.4 31.7,74.4 C_BI.1 v2(32.7,74.2) ; v2(35.595,70.3) 35.65,70.355 ADC.61 35.65,73.25 v1(35.6,73.3)
  Signal Layer 1 w0.15: v1(35.6,73.3) 35.6,88.52 ADS/IN/OUT.10
  Signal Layer 2 w0.15: v2(32.7,74.2) 32.7,71.4 34.15,69.95 35.245,69.95 v2(35.595,70.3)
NetADC_62: ADC.62 ADS/IN/OUT.9 | length 21
  Top w0.15: v2(35.1,70.3) 35.1,71.78 ADC.62
  Signal Layer 2 w0.15: ADS/IN/OUT.9 33.74,71.66 v2(35.1,70.3)
NetADC_63: ADC.63 ADS/IN/OUT.8 C_BI.2 RBI_OUT.2 RBI_PROT.1 | length 54.2
  Top w0.15: RBI_OUT.2 4.6,67.4 6.3,69.1 7.6,69.1 8.6,70.1 RBI_PROT.1 12.2,75.4 C_BI.2 31.1,76.45 31.35,76.7 33.225,76.7 ; ADS/IN/OUT.8 33.225,87.175 33.225,76.7 ; ADC.63 34.65,73.226 33.225,74.651 33.225,76.7
NetANTI_STAT1_1: ANTI_STAT1.1 CH_Input.2 Rf0.2 | length 66.3
  Top w0.15: CH_Input.2 12.294,54.4 18.5,48.194 Rf0.2 8.2,46.9 4.6,50.5 2.4,50.5 1.7,49.8 1.7,32.324 6.325,27.7 ANTI_STAT1.1
NetANTI_STAT1_2: ANTI_STAT1.2 CH_Input.3 Rf1.2 | length 50.2
  Top w0.15: CH_Input.3 3.3,51.824 1.4,49.924 1.4,32.2 10.5,23.1 ; ANTI_STAT1.2 11.6,24.2 10.5,23.1 ; Rf1.2 18.4,16.4 13.675,21.125 12.475,21.125 10.5,23.1
NetANTI_STAT1_4: ANTI_STAT1.4 CH_Input.4 Rf2.2 | length 64.1
  Top w0.15: CH_Input.4 2,48.02 2,41.7 12.249,31.451 ; ANTI_STAT1.4 12.249,31.451 ; Rf2.2 44.6,25.1 35.9,33.8 14.599,33.8 12.249,31.451
NetANTI_STAT2_2: ANTI_STAT2.2 CH_Input.5 RBI_PROT.2 | length 69.7
  Top w0.15: CH_Input.5 3.3,46.681 11.5,38.481 ANTI_STAT2.2 11.5,36.801 12.101,36.2 13.5,36.2 15.3,38 15.3,43.3 16.8,44.8 21.1,44.8 21.1,46.6 9,58.7 2.8,58.7 1.8,59.7 1.8,67 4.6,69.8 RBI_PROT.2
NetCf00_1: Cf00.1 OP1.2 Rf00.1 | length 19.4
  Top w0.15: Rf00.1 Cf00.1 27.8,32.1 v1(28.5,32.8)
  Signal Layer 1 w0.15: v1(28.5,32.8) 28.5,36.28 v1(32.49,40.27)
NetCf0_2: Cf0.2 OP1.3 Rf0.1 | length 20.8
  Top w0.15: Rf0.1 20.3,42.9 24.3,46.9 Cf0.2 25.7,44.618 32.49,37.828 OP1.3
NetCf1_2: Cf1.2 OP2.3 Rf1.1 | length 17.1
  Top w0.15: Rf1.1 19.5,11.2 21.4,13.1 21.4,14.2 22.4,15.2 Cf1.2 31.82,15.2 OP2.3
NetCf2_2: Cf2.2 OP3.3 Rf2.1 | length 16.6
  Top w0.15: Rf2.1 51.4,21.1 Cf2.2 56.83,26.53 OP3.3
NetCf11_1: Cf11.1 OP2.2 Rf11.1 | length 16.4
  Top w0.15: Rf11.1 Cf11.1 27.96,21.6 OP2.2
NetCf22_1: Cf22.1 OP3.2 Rf22.1 | length 16.1
  Top w0.15: Rf22.1 Cf22.1 55.3,30.5 56.73,29.07 OP3.2
NetCG1_1: CG1.1 MCU.C1 | length 22.2
  Top w0.15: CG1.1 86.5,63.4 MCU.C1
NetCG1_2: CG1.2 MCU.D1 | length 21.3
  Top w0.15: CG1.2 84.36,63 MCU.D1
NetCG1_5: CG1.5 MCU.G1 | length 22.7
  Top w0.15: CG1.5 87.66,61.8 MCU.G1
NetCG2_1: CG2.1 MCU.C2 | length 23.1
  Signal Layer 1 w0.15: CG2.1 91.2,75.124 102.924,63.4 v1(103.9,63.4)
NetCG2_2: CG2.2 MCU.D2 | length 22.5
  Signal Layer 1 w0.15: CG2.2 89.404,76.496 102.9,63 v1(103.9,63)
NetCG2_3: CG2.3 MCU.E2 | length 22.3
  Signal Layer 1 w0.15: CG2.3 88.368,77.108 102.876,62.6 v1(103.9,62.6)
NetCG2_4: CG2.4 MCU.F2 | length 23.5
  Signal Layer 1 w0.15: CG2.4 89.74,75.312 102.852,62.2 v1(103.9,62.2)
NetCG2_5: CG2.5 MCU.G2 | length 24.7
  Signal Layer 1 w0.15: CG2.5 91.084,73.516 102.8,61.8 v1(103.9,61.8)
NetCG3_1: CG3.1 MCU.C3 | length 25.2
  Signal Layer 2 w0.15: CG3.1 91.5,51 103.9,63.4 v2(104.3,63.4)
NetCG3_2: CG3.2 MCU.D3 | length 24
  Signal Layer 2 w0.15: CG3.2 90.128,49.204 103.924,63 v2(104.3,63)
NetCG3_3: CG3.3 MCU.E3 | length 22.8
  Signal Layer 2 w0.15: CG3.3 89.288,48.904 90.252,48.904 103.948,62.6 v2(104.3,62.6)
NetCG3_4: CG3.4 MCU.F3 | length 22.7
  Signal Layer 2 w0.15: CG3.4 89.588,47.587 104.201,62.2 v2(104.3,62.2)
NetCG3_5: CG3.5 MCU.G3 | length 23.3
  Signal Layer 2 w0.15: CG3.5 91.384,48.884 v2(104.3,61.8)
NetCG7_1: CG7.1 MCU.C7 | length 22.8
  Signal Layer 2 w0.15: v2@105.9,63.4 123.5,63.4 CG7.1
  other v2: 105.9,63.4
NetCG7_2: CG7.2 MCU.D7 | length 21.9
  Signal Layer 2 w0.15: v2(105.9,63) 123.524,63 125.084,64.56 CG7.2
NetCG7_3: CG7.3 MCU.E7 | length 21.5
  Signal Layer 2 w0.15: v2(105.9,62.6) 126.62,62.6 CG7.3
NetCG7_4: CG7.4 MCU.F7 | length 22.4
  Signal Layer 2 w0.15: v2(105.9,62.2) 124.48,62.2 CG7.4
NetCG7_5: CG7.5 MCU.G7 | length 24.1
  Top w0.15: v2(105.5,61.8) MCU.G7
  Signal Layer 2 w0.15: v2(105.5,61.8) 122.34,61.8 CG7.5
NetCG8_1: CG8.1 MCU.C8 | length 22.4
  Signal Layer 1 w0.15: v1(106.3,63.4) 106.35,63.45 106.726,63.45 118.2,74.924 CG8.1
NetCG8_3: CG8.3 MCU.E8 | length 21.5
  Signal Layer 1 w0.15: v1(106.3,62.6) 107.284,62.6 CG8.3
NetCG8_4: CG8.4 MCU.F8 | length 22.7
  Signal Layer 1 w0.15: v1(106.3,62.2) 107.308,62.2 120.42,75.312 CG8.4
NetCG8_5: CG8.5 MCU.G8 | length 23.9
  Signal Layer 1 w0.15: v1(106.3,61.8) 107.333,61.8 119.049,73.516 CG8.5
NetCG9_1: CG9.1 MCU.C9 | length 24.5
  Top w0.15: MCU.C9 106.75,63.45 113.55,63.45 CG9.1
NetCG9_3: CG9.3 MCU.E9 | length 23.9
  Top w0.15: MCU.E9 106.805,62.6 106.905,62.7 110.284,62.7 122.408,50.576 CG9.3
NetCG9_4: CG9.4 MCU.F9 | length 23
  Top w0.15: MCU.F9 107.876,62.2 120.612,49.464 CG9.4
NetCG9_5: CG9.5 MCU.G9 | length 23.7
  Top w0.15: MCU.G9 107.851,61.8 118.816,50.836 CG9.5
NetJ/H_1: J/H.1 MCU.J1 | length 30.6
  Top w0.15: J/H.1 95.36,34.921 96.925,36.486 96.925,36.704 103.5,43.279 MCU.J1
NetJ/H_2: J/H.2 MCU.J2 | length 29.7
  Top w0.15: J/H.2 97.9,34.921 99.465,36.486 99.465,36.704 103.9,41.139 MCU.J2
NetJ/H_3: J/H.3 MCU.J3 | length 28.8
  Top w0.15: J/H.3 100.44,34.921 101.705,36.186 101.705,36.828 104.3,39.423 MCU.J3
NetJ/H_4: J/H.4 MCU.J4 | length 28.8
  Top w0.15: J/H.4 102.98,34.921 102.005,35.896 102.005,36.704 104.7,39.399 MCU.J4
NetJ/H_5: J/H.5 MCU.J5 | length 27.9
  Top w0.15: MCU.J5 105.1,37.259 104.545,36.704 104.545,35.896 105.1,35.341 105.1,34.18 J/H.5
NetJ/H_6: J/H.6 MCU.J6 | length 28.3
  Top w0.15: MCU.J6 105.5,37.699 106.495,36.704 106.495,35.325 J/H.6
NetJ/H_7: J/H.7 MCU.J7 | length 29.2
  Top w0.15: MCU.J7 105.9,39.839 109.035,36.704 109.035,35.325 J/H.7
NetJ/H_8: J/H.8 MCU.J8 | length 30.1
  Top w0.15: MCU.J8 106.3,41.979 111.575,36.704 111.575,35.325 J/H.8
NetJ/H_9: J/H.9 MCU.J9 | length 31.3
  Top w0.15: MCU.J9 106.7,43.5 112.925,37.275 113.544,37.275 114.304,36.515 114.304,35.136 J/H.9
NetJ/H_10: J/H.10 MCU.H1 | length 28.5
  Signal Layer 1 w0.15: J/H.10 103.5,44.44 v1(103.5,61.4)
NetJ/H_11: J/H.11 MCU.H2 | length 27.6
  Signal Layer 1 w0.15: J/H.11 103.9,42.3 v1(103.9,61.4)
NetJ/H_12: J/H.12 MCU.H3 | length 26.7
  Signal Layer 1 w0.15: J/H.12 104.3,40.16 v1(104.3,61.4)
NetJ/H_13: J/H.13 MCU.H4 | length 25.8
  Signal Layer 1 w0.15: J/H.13 104.7,38.02 v1(104.7,61.4)
NetJ/H_14: J/H.14 MCU.H5 | length 25.3
  Signal Layer 1 w0.15: v1(105.1,61.4) 105.1,38.836 105.52,38.416 J/H.14
NetJ/H_15: J/H.15 MCU.H6 | length 26.2
  Signal Layer 1 w0.15: v1(105.5,61.4) 105.5,38.86 J/H.15
NetJ/H_16: J/H.16 MCU.H7 | length 27
  Signal Layer 1 w0.15: v1(105.9,61.4) 105.9,43.116 110.6,38.416 J/H.16
NetJ/H_17: J/H.17 MCU.H8 | length 27.9
  Signal Layer 1 w0.15: v1(106.3,61.4) 106.3,43.14 J/H.17
NetOP1_1: OP1.1 R1.2 | length 4.9
  Top w0.15: OP1.1 34.2,44.52 R1.2
NetOP1_6: OP1.6 Rf0_2.2 | length 43.9
  Top w0.15: Rf0_2.2 21.1,60.8 21.1,64.218 22.207,65.325 23.993,65.325 25.1,64.218 25.1,58.324 36.9,46.524 36.9,40.94 OP1.6
NetOP1_8: OP1.8 R1.1 | length 5
  Top w0.15: R1.1 38.2,44.72 OP1.8
NetOP2_1: OP2.1 RG2.2 | length 4.3
  Top w0.15: OP2.1 34.6,21.12 RG2.2
NetOP2_6: OP2.6 Rf1_2.2 | length 72
  Top w0.15: Rf1_2.2 24.2,64.5 24.8,63.9 24.8,58.2 36.1,46.9 36.1,36.3 38,34.4 39.521,34.4 39.706,34.215 40.485,34.215 42.1,32.6 43.3,32.6 46.9,29 48.9,29 50.6,27.3 50.6,23.2 46.7,23.2 45.7,22.2 45.7,19.52 OP2.6
NetOP2_8: OP2.8 RG2.1 | length 4.3
  Top w0.15: RG2.1 38.6,21.12 OP2.8
NetOP3_1: OP3.1 RG3.2 | length 5
  Top w0.15: OP3.1 64.1,33.72 RG3.2
NetOP3_6: OP3.6 Rf2_2.2 | length 82.7
  Top w0.15: Rf2_2.2 23.1,72.018 26.075,69.043 26.075,63.807 26.207,63.675 29.947,63.675 31.547,62.075 52.943,62.075 65.125,49.893 65.125,27.175 65.77,26.53 OP3.6
NetOP3_8: OP3.8 RG3.1 | length 4.7
  Top w0.15: RG3.1 68.1,33.12 OP3.8
VCC: OP1.7 OP2.7 OP3.7 POWER.2 | length 155.8
  Top w0.15: OP1.7 42.4,37.98 42.4,34.7 47.8,29.3 49.024,29.3 50.229,28.095 54.5,28.095 ; OP2.7 38.294,16.77 37.2,15.676 37.2,12.6 39.9,9.9 42.3,9.9 46,13.6 46,22.076 46.824,22.9 50.724,22.9 54.5,26.676 54.5,28.095 ; POWER.2 91.56,7.12 OP3.7 67.77,29.07 67.2,28.5 67.2,27.7 67.395,27.505 70.014,27.505 70.585,26.934 70.585,26.126 69.759,25.3 65.1,25.3 62.305,28.095 54.5,28.095
VEE: OP1.4 OP2.4 OP3.4 POWER.1 | length 165.2
  Top w0.15: OP1.4 35.41,35.19 42.8,27.8 47.9,27.8 49.4,26.3 49.4,25.182 48.118,23.9 45,23.9 43.3,25.6 36.6,25.6 36.6,15.5 OP2.4 36.08,8.4 46.4,8.4 OP3.4 81.4,4.58 POWER.1
pads on no net: ADC.11 ADC.13 ADC.15 ADC.18 ADC.27 ADC.29 ADC.64 ANTI_STAT1.6 ANTI_STAT2.6 ST-Link/V2.2 ST-Link/V2.3 ST-Link/V2.11 ST-Link/V2.15 ST-Link/V2.17 ST-Link/V2.19

## Polygon pours and split planes (outlines as drawn)
GNDA on Top "GNDA Signal" (solid, remove dead copper, shelved, pour order 36): 0,97.1 135.5,97.1 135.5,0 0,0
no net on Top "GNDA-No Net" (solid, shelved, pour order 8): 79.7,63.4
no net on Top "GNDA-No Net 1" (solid, shelved, pour order 6): 81.2,68.8
no net on Top "GNDA-No Net 2" (solid, shelved, pour order 4): 95.6,57.1
GNDA on Bottom "GNDA signal" (solid, remove dead copper, shelved, pour order 34): 0,97.1 135.5,97.1 135.5,0 0,0

## Keep-outs
Keep-Out Layer:
  the board outline again, w0.254

## Silkscreen, mask and mechanical layers (free items; w line width, h text height)
Top Overlay:
  text "Micsa Alpha" at 47,43.4 h2
  text "Altium" at 102,3.6 h1.52

## Text inside footprints (layer, text, board x,y; h text height)
A/B: Top Overlay "18" at 116.832,89.932 h1.27; Top Overlay "9" at 116.832,87.392 h1.27; Top Overlay "1" at 91.432,87.392 h1.27; Top Overlay "10" at 90.924,89.932 h1.27
J/H: Top Overlay "10" at 91.804,35.792 h1.27; Top Overlay "1" at 92.312,33.252 h1.27; Top Overlay "9" at 117.712,33.252 h1.27; Top Overlay "18" at 117.712,35.792 h1.27
ST-Link/V2: Top Overlay "2" at 51.44,89.932 h1.27; Top Overlay "1" at 51.44,87.392 h1.27; Top Overlay "19" at 78.364,87.392 h1.27; Top Overlay "20" at 78.364,89.932 h1.27